# EAGLE board PM_sensor_breakout_v1 (EAGLE 6.4)
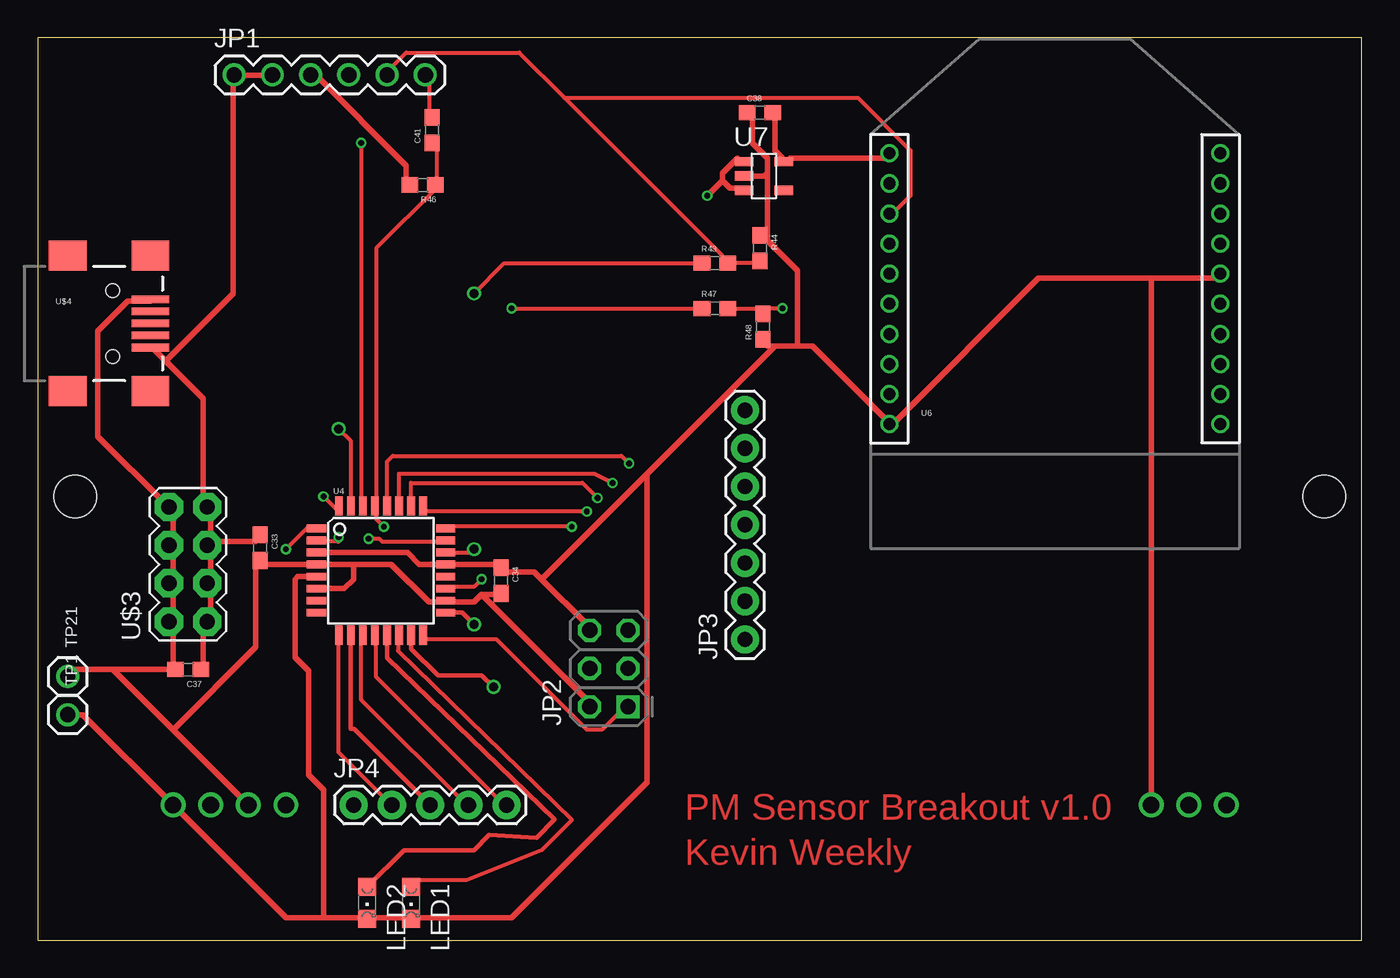
[diagram p0: board, top side]
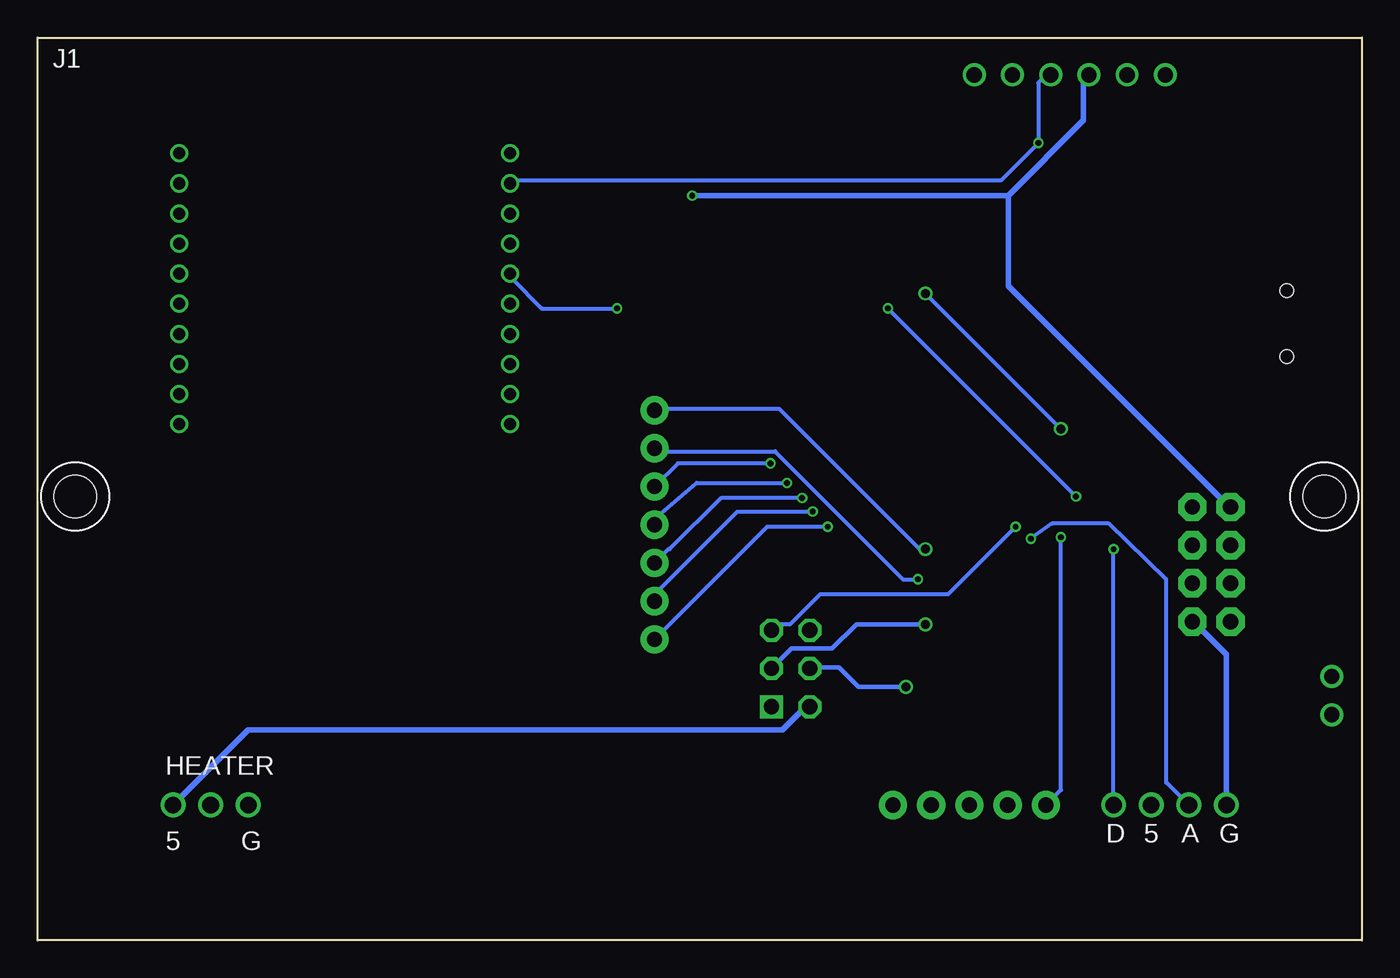
[diagram p1: board, bottom side, seen from below]

Size 88 x 60 mm. Coordinates in mm from the lower left corner, seen from the top.
Outline: 0,0 88,0 88,60 0,60 0,0
Copper layers (1*16): Top 0.035mm / dielectric 1.5mm / Bottom 0.035mm
Design rules "FusionPCB_modified": minimum track width 6mil, minimum drill 12mil, track to track 6mil, track to pad 6mil, pad to pad 6mil, via to via 6mil, smd to smd 0mil, copper to edge 10mil, drill to drill 10mil, minimum pad ring 6mil, minimum via ring 6mil, stop-mask expansion 2mil, vias tented up to drill 100mil, thermal gap 10mil
Net classes: 0 default: width 0.254 mm, drill 0.381 mm, clearance 0.254 mm; 1 power: width 0.381 mm, drill 0.381 mm, clearance 0.254 mm

## Footprints (pad centres in the part's own frame; a part is rotated, then mirrored left to right if it is on the bottom)
0603 = smd 1.1 x 1: 1 -0.85,0; 2 0.85,0
PPD60PV = drill 1.1: CN1_1 35,-21; CN1_2 32.5,-21; CN1_3 30,-21; CN1_4 27.5,-21; CN2_1 -30,-21; CN2_2 -32.5,-21; CN2_3 -35,-21 | hole 2.8: -41.5,-0.5; 41.5,-0.5
1X06 = drill 1.016: 1 0,0; 2 2.54,0; 3 5.08,0; 4 7.62,0; 5 10.16,0; 6 12.7,0
2X3-NS = drill 1.016 square: 1 -2.54,-1.27 | drill 1.016 octagon: 2 -2.54,1.27; 3 0,-1.27; 4 0,1.27; 5 2.54,-1.27; 6 2.54,1.27
1X07 = drill 1.016 pad 1.88: 1 0,0; 2 2.54,0; 3 5.08,0; 4 7.62,0; 5 10.16,0; 6 12.7,0; 7 15.24,0
1X05 = drill 1.016 pad 1.88: 1 0,0; 2 2.54,0; 3 5.08,0; 4 7.62,0; 5 10.16,0
CHIPLED_0805 = smd 1.2 x 1.2: A 0,-1.05; C 0,1.05
TESTPOINT-100MIL = drill 1.016: 2 0,0
TQFP32-08 = smd 1.27 x 0.508: 1 -4.293,2.8; 2 -4.293,2; 3 -4.293,1.2; 4 -4.293,0.4; 5 -4.293,-0.4; 6 -4.293,-1.2; 7 -4.293,-2; 8 -4.293,-2.8; 17 4.293,-2.8; 18 4.293,-2; 19 4.293,-1.2; 20 4.293,-0.4; 21 4.293,0.4; 22 4.293,1.2; 23 4.293,2; 24 4.293,2.8 | smd 0.508 x 1.27: 9 -2.8,-4.293; 10 -2,-4.293; 11 -1.2,-4.293; 12 -0.4,-4.293; 13 0.4,-4.293; 14 1.2,-4.293; 15 2,-4.293; 16 2.8,-4.293; 25 2.8,4.293; 26 2,4.293; 27 1.2,4.293; 28 0.4,4.293; 29 -0.4,4.293; 30 -1.2,4.293; 31 -2,4.293; 32 -2.8,4.293
XBEE-1 = drill 0.8: 1 -11,20; 2 -11,18; 3 -11,16; 4 -11,14; 5 -11,12; 6 -11,10; 7 -11,8; 8 -11,6; 9 -11,4; 10 -11,2; 11 11,2; 12 11,4; 13 11,6; 14 11,8; 15 11,10; 16 11,12; 17 11,14; 18 11,16; 19 11,18; 20 11,20
TSOT23-5_LINEAR = smd 0.62 x 1.22: 1 -0.95,-1.31; 2 0,-1.31; 3 0.95,-1.31; 4 0.95,1.31; 5 -0.95,1.31
2X4 = drill 1.016 pad 1.88 octagon: 1 -3.81,-1.27; 2 -3.81,1.27; 3 -1.27,-1.27; 4 -1.27,1.27; 5 1.27,-1.27; 6 1.27,1.27; 7 3.81,-1.27; 8 3.81,1.27
USB-MINIB = smd 2.5 x 0.5: D+ 2.5,0; D- 2.5,0.8; GND 2.5,-1.6; ID 2.5,-0.8; VBUS 2.5,1.6 | smd 2.5 x 2: MTN1 -3,4.5; MTN2 2.5,4.5; MTN3 -3,-4.5; MTN4 2.5,-4.5 | hole 0.9: 0,2.2; 0,-2.2

## Placement (x,y rotation side)
C33  .1u  [0603]  14.79,26.1 270 top
C34  .1u  [0603]  30.79,23.91 270 top
C37  10u  [0603]  10,18 180 top
C38  10u  [0603]  48,55 0 top
C41  .1u  [0603]  26.21,53.85 90 top
J1  PPD60PV  [PPD60PV]  44,30 0 bottom
JP1  [1X06]  13.06,57.52 0 top
JP2  AVR_SPI_PRG_6NS  [2X3-NS]  37.96,18.07 90 top
JP3  [1X07]  47,20 90 top
JP4  [1X05]  21,9 0 top
LED1  [CHIPLED_0805]  24.82,2.5 180 top
LED2  [CHIPLED_0805]  21.9,2.5 180 top
R43  4.7k  [0603]  45,45 0 top
R44  10k  [0603]  48,46 270 top
R46  10k  [0603]  25.58,50.21 180 top
R47  4.7k  [0603]  45,42 0 top
R48  10k  [0603]  48.21,40.8 90 top
TP1  TESTPOINT100MIL  [TESTPOINT-100MIL]  2,15 0 top
TP21  TESTPOINT100MIL  [TESTPOINT-100MIL]  2,17.54 0 top
U4  ATMEGA168  [TQFP32-08]  22.82,24.58 0 top
U6  XBEE-1B1  [XBEE-1]  67.6,32.31 0 top
U7  [TSOT23-5_LINEAR]  48.26,50.8 270 top
U$3  M04X2  [2X4]  10,25 90 top
U$4  USB-MINIB-5PIN  [USB-MINIB]  5,41 0 top

## Library data of the parts
C33 C34 C37 C38 C41 JP2 R43 R44 R46-R48 U4 U6 = SparkFun
J1 U7 = Cool_Electricity
JP1 = custom
JP3 JP4 U$3 U$4 = SparkFun-Connectors
LED1 LED2 = led
TP1 TP21 = WSNlib

## Nets
3.3V [power]: C38.2 U6.1 U7.5
5V [power]: C33.2 C34.2 C37.2 J1.CN1_3 J1.CN2_3 JP1.3 JP2.2 R46.2 TP21.2 U4.4 U4.6 U4.18 U7.1 U7.3 U$3.2 U$3.4 U$3.6 U$3.8 U$4.VBUS
ANALOG: J1.CN1_2 U4.23
ATMEGA_TO_XB: JP1.5 R43.2 R44.2 U6.3
DIGITAL: J1.CN1_4 U4.1
GND [power]: C33.1 C34.1 C37.1 C38.1 J1.CN1_1 J1.CN2_1 JP1.1 JP1.2 JP2.6 LED1.C LED2.C R44.1 R48.1 TP1.2 U4.3 U4.5 U4.21 U6.10 U6.16 U7.2 U$3.1 U$3.3 U$3.5 U$3.7 U$4.GND
MISO: JP2.1 U4.16
MOSI: JP2.4 U4.15
N$1: LED2.A U4.13
N$2: JP3.1 U4.24
N$3: LED1.A U4.14
N$4: JP3.2 U4.25
N$5: JP3.3 U4.26
N$6: JP3.4 U4.27
N$7: JP3.5 U4.28
N$8: JP3.6 U4.19
N$9: JP3.7 U4.22
N$10: JP4.1 U4.2
N$11: JP4.2 U4.9
N$12: JP4.3 U4.10
N$13: JP4.4 U4.11
N$14: JP4.5 U4.12
N$20: R43.1 U4.31
N$22: R47.1 U4.32
RST: C41.1 JP2.5 R46.1 U4.29
RTS#: C41.2 JP1.6
SCLK: JP2.3 U4.17
XB_RESET: R47.2 R48.2 U6.5
XB_TO_ATMEGA: JP1.4 U4.30 U6.2

## Tracks (layer width: path | path; a pad name or v marks a point on that pad's centre or on a via)
3.3V
  Top 0.381: C38.2 49,55 49,52.5 49.5,52 U7.5 50,52 56.5,52 U6.1
5V  (via drill 0.38)
  Top 0.381: 29.5,23 30.5,23 C34.2 | 29.5,23 29,22.5 27.5,22.5 U4.18 27,22.5 26,22.5 23.5,25 21,25 | 21,25 19,25 U4.4 18.5,25 15,25 C33.2 14.5,25 14.5,19.5 9,14 | 29.5,23 36.5,16 JP2.2 | 45.5,50.5 46,50 46.5,50 U7.3 | 45.5,50.5 45.5,51 46.5,52 U7.1 | R46.2 24.5,50.5 24.5,51.5 18.5,57.5 JP1.3 | v44.5,49.5 45.5,50.5 | U$4.VBUS 7.5,42.5 6,42.5 4,40.5 4,33.5 8.5,29 U$3.8 9,28.5 9,26.5 U$3.6 9,26 9,24 U$3.4 9,23.5 9,21.5 U$3.2 9,21 9,18 | 9,18 5,18 | 5,18 2,18 TP21.2 | 9,18 C37.2 | 5,18 9,14 | 9,14 J1.CN1_3 | U4.6 20.38,23.38 21,24 21,25
  Bottom 0.381: J1.CN2_3 74,14 38.5,14 37,15.5 JP2.2 | 23.5,49.5 v44.5,49.5 | 23.5,49.5 18.5,54.5 18.5,57.5 JP1.3 | 23.5,49.5 23.5,43.5 9,29 U$3.8
ANALOG  (via drill 0.38)
  Top 0.254: v22,26.7 22.7,26.7 22.9,26.5 27,26.5 U4.23
  Bottom 0.254: v22,26.7 20.6,27.7 16.8,27.7 13,24 13,10.5 J1.CN1_2
ATMEGA_TO_XB
  Top 0.254: R44.2 48,45 R43.2 45.5,45 45.5,45.5 35,56 | 35,56 32,59 24.5,59 23.5,58 JP1.5 | 35,56 54.5,56 58,52.5 58,49.5 57,48.5 U6.3
DIGITAL  (via drill 0.38)
  Top 0.254: v16.5,26 18,27.5 18.5,27.5 U4.1
  Bottom 0.254: J1.CN1_4 v16.5,26
GND
  Top 0.381: 19,1.5 16.5,1.5 J1.CN1_1 3,15 TP1.2 | 19,1.5 21.5,1.5 LED2.C 22,1.5 24.5,1.5 LED1.C 25,1.5 31.5,1.5 40.5,10.5 40.5,31 | C37.1 11,18 11,21 U$3.1 11.5,21.5 11.5,23.5 U$3.3 11.5,24 11.5,26 U$3.5 11.5,26.5 | 11.5,26.5 14.5,26.5 C33.1 | JP1.2 15.5,57.5 13.5,57.5 JP1.1 13,57.5 13,43 8.5,38.5 | 8.5,38.5 11,36 11,29 U$3.7 11.5,28.5 11.5,26.5 | 8.5,38.5 7.5,39.5 U$4.GND | 33.5,24 36.5,21 JP2.6 | 33.5,24 33,24.5 31,24.5 C34.1 30.5,25 27.13,25 U4.21 27.02,24.98 27,25 | 50.5,39.5 51.5,39.5 56.5,34.5 U6.10 57,34.5 66.5,44 74,44 | 50.5,39.5 49,39.5 | 49,39.5 48.5,39.5 R48.1 | 48.5,46.5 48,46.5 R44.1 | 48.5,46.5 50.5,44.5 50.5,39.5 | 48.5,46.5 48.5,51 | 48.5,51 48.5,52 47.5,53 47.5,55 C38.1 | 74,44 78.5,44 U6.16 | 74,44 J1.CN2_1 | 49,39.5 40.5,31 | 40.5,31 33.5,24 | U4.3 24.57,25.78 25.35,25 27,25 | 27,25 27.09,25 | U4.5 17.28,24.18 17.1,24 17.1,18.8 18,17.9 18,11 19,10 19,1.5 | U7.2 48.3,50.8 48.5,51
  Bottom 0.381: J1.CN1_1 9,19 11,21 U$3.1
MISO
  Top 0.254: U4.16 25.5,20 30.5,20 36.5,14 37.5,14 39,15.5 JP2.1
MOSI  (via drill 0.6)
  Top 0.305: U4.15 24.82,19.38 26.6,17.6 29.5,17.6 v30.3,16.85
  Bottom 0.305: v30.3,16.85 33.45,16.85 34.75,18.15 36.61,18.15 JP2.4
N$1
  Top 0.305: U4.13 23.22,18.78 34.35,8.05 33.15,6.8 30,7 29,6 24.35,6 LED2.A
N$2  (via drill 0.38)
  Top 0.254: v35.5,27.5 27.5,27.5 U4.24
  Bottom 0.254: v35.5,27.5 39.5,27.5 JP3.1
N$3
  Top 0.254: LED1.A 25,4 28.5,4 33.5,6 35.5,8 23.95,19.25 24,20 U4.14
N$4  (via drill 0.38)
  Top 0.254: v36.5,28.5 25.5,28.5 U4.25
  Bottom 0.254: v36.5,28.5 41.5,28.5 47,23 JP3.2
N$5  (via drill 0.38)
  Top 0.254: U4.26 24.82,30.38 24.8,30.4 36.2,30.4 v37.2,29.4
  Bottom 0.254: v37.2,29.4 42.6,29.4 46,26 46.08,26 JP3.3
N$6  (via drill 0.38)
  Top 0.254: v38.2,30.4 37,31 24,31 24,29 U4.27
  Bottom 0.254: v38.2,30.4 44.2,30.4 47,28 JP3.4
N$7  (via drill 0.38)
  Top 0.254: U4.28 23.22,31.82 23.6,32.2 38.8,32.2 v39.3,31.7
  Bottom 0.254: v39.3,31.7 45.46,31.7 JP3.5
N$8  (via drill 0.38)
  Top 0.254: v29.5,24 29,23.5 27.5,23.5 U4.19
  Bottom 0.254: v29.5,24 30.5,24 39,32.5 47,32.5 JP3.6
N$9  (via drill 0.6)
  Top 0.254: U4.22 28.78,25.78 v29,26
  Bottom 0.254: v29,26 29.4,26 38.7,35.3 46.94,35.3 JP3.7
N$10  (via drill 0.38)
  Top 0.254: v20,26.8 20,26.5 19,26.5 U4.2
  Bottom 0.254: v20,26.8 20,10 JP4.1
N$11
  Top 0.254: U4.9 20,20 20,12.5 23.5,9 JP4.2
N$12
  Top 0.305: U4.10 20.8,20.29 20.8,14.05 21.03,14.05 JP4.3
N$13
  Top 0.254: U4.11 21.5,20 21.5,16 28.5,9 JP4.4
N$14
  Top 0.254: U4.12 22.5,20 22.5,17.5 31,9 JP4.5
N$20  (via drill 0.6)
  Top 0.254: U4.31 20.82,33.18 v20,34 | v29,43 31,45 R43.1
  Bottom 0.254: v20,34 v29,43
N$22  (via drill 0.38)
  Top 0.254: v31.5,42 R47.1 | v19,29.5 20,28.5 U4.32
  Bottom 0.254: v19,29.5 v31.5,42
RST  (via drill 0.38)
  Top 0.254: C41.1 26.5,53 26.5,50.5 R46.1 26.5,50 22.5,46 22.5,29 U4.29 22.5,28.5 22.5,28 v23,27.5
  Bottom 0.254: v23,27.5 27.5,23 36,23 38,21 39,21 JP2.5
RTS#
  Top 0.254: C41.2 26,55 26,57.5 JP1.6
SCLK  (via drill 0.6)
  Top 0.305: U4.17 28.22,21.78 v29,21
  Bottom 0.305: v29,21 33.6,21 35.2,19.4 37.9,19.4 JP2.3
XB_RESET  (via drill 0.38)
  Top 0.254: R47.2 48,42 R48.2 48.5,42 v49.5,42
  Bottom 0.254: v49.5,42 54.5,42 56.5,44 U6.5
XB_TO_ATMEGA  (via drill 0.38)
  Top 0.254: v21.5,53 21.5,29 U4.30
  Bottom 0.254: JP1.4 21,57.5 21.5,57 v21.5,53 24,50.5 56.5,50.5 U6.2

## Text on the board
Top: PM Sensor Breakout v1.0 | Kevin Weekly